# Altium PCB KNoT_Thing_Starter_Board.PcbDoc
Units mm, origin at the board's own origin, x right, y up, seen from the top; angles counter-clockwise.
Board outline 45.72 x 43.18 mm, 2 copper layers (Top Layer, Bottom Layer); 20 components, 31 nets, 133 pads, 19 vias.
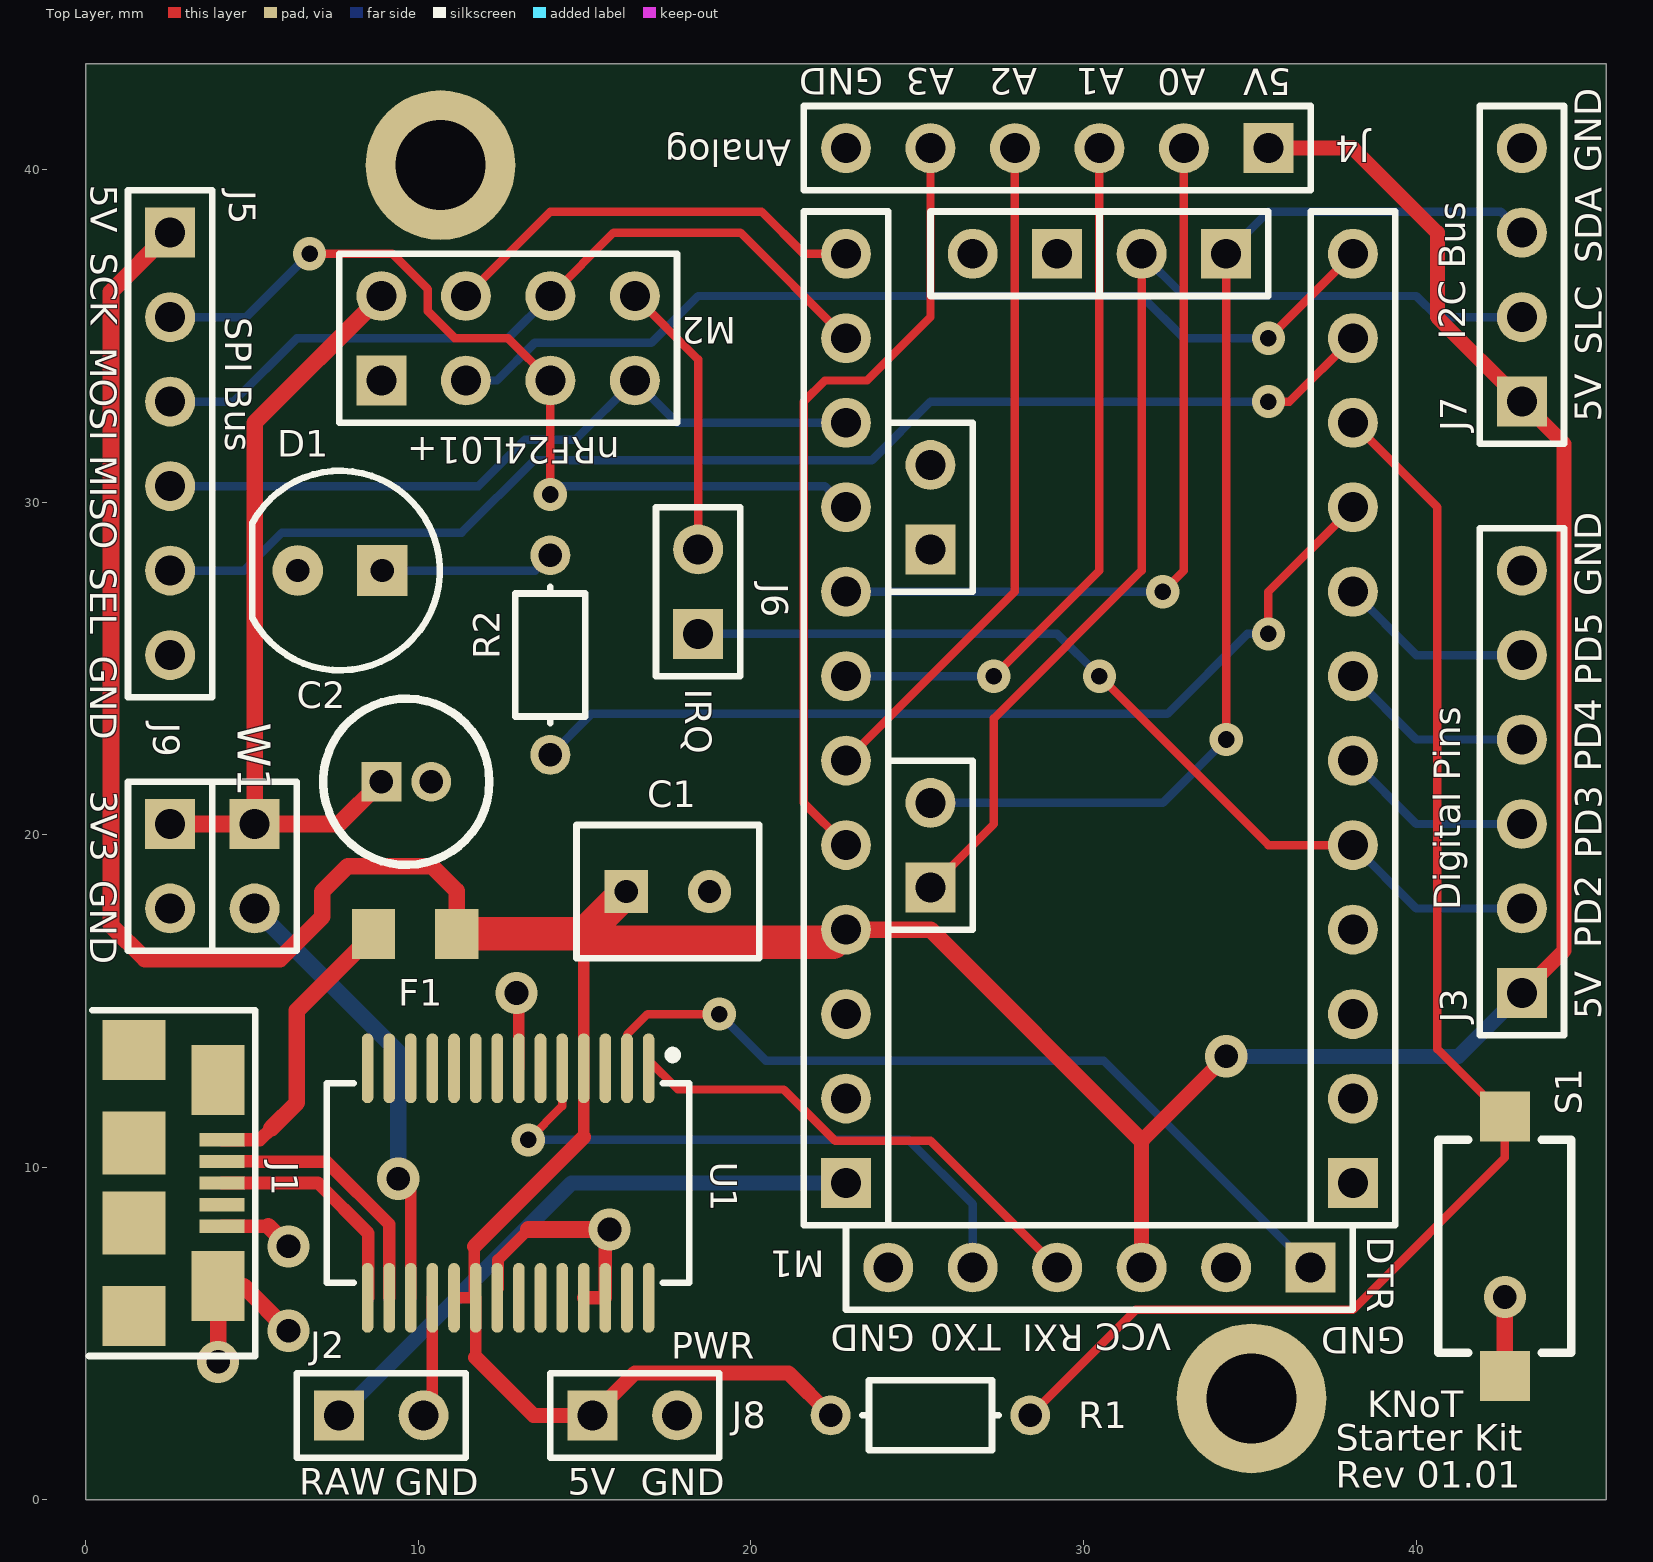
[diagram p0: Top Layer view]
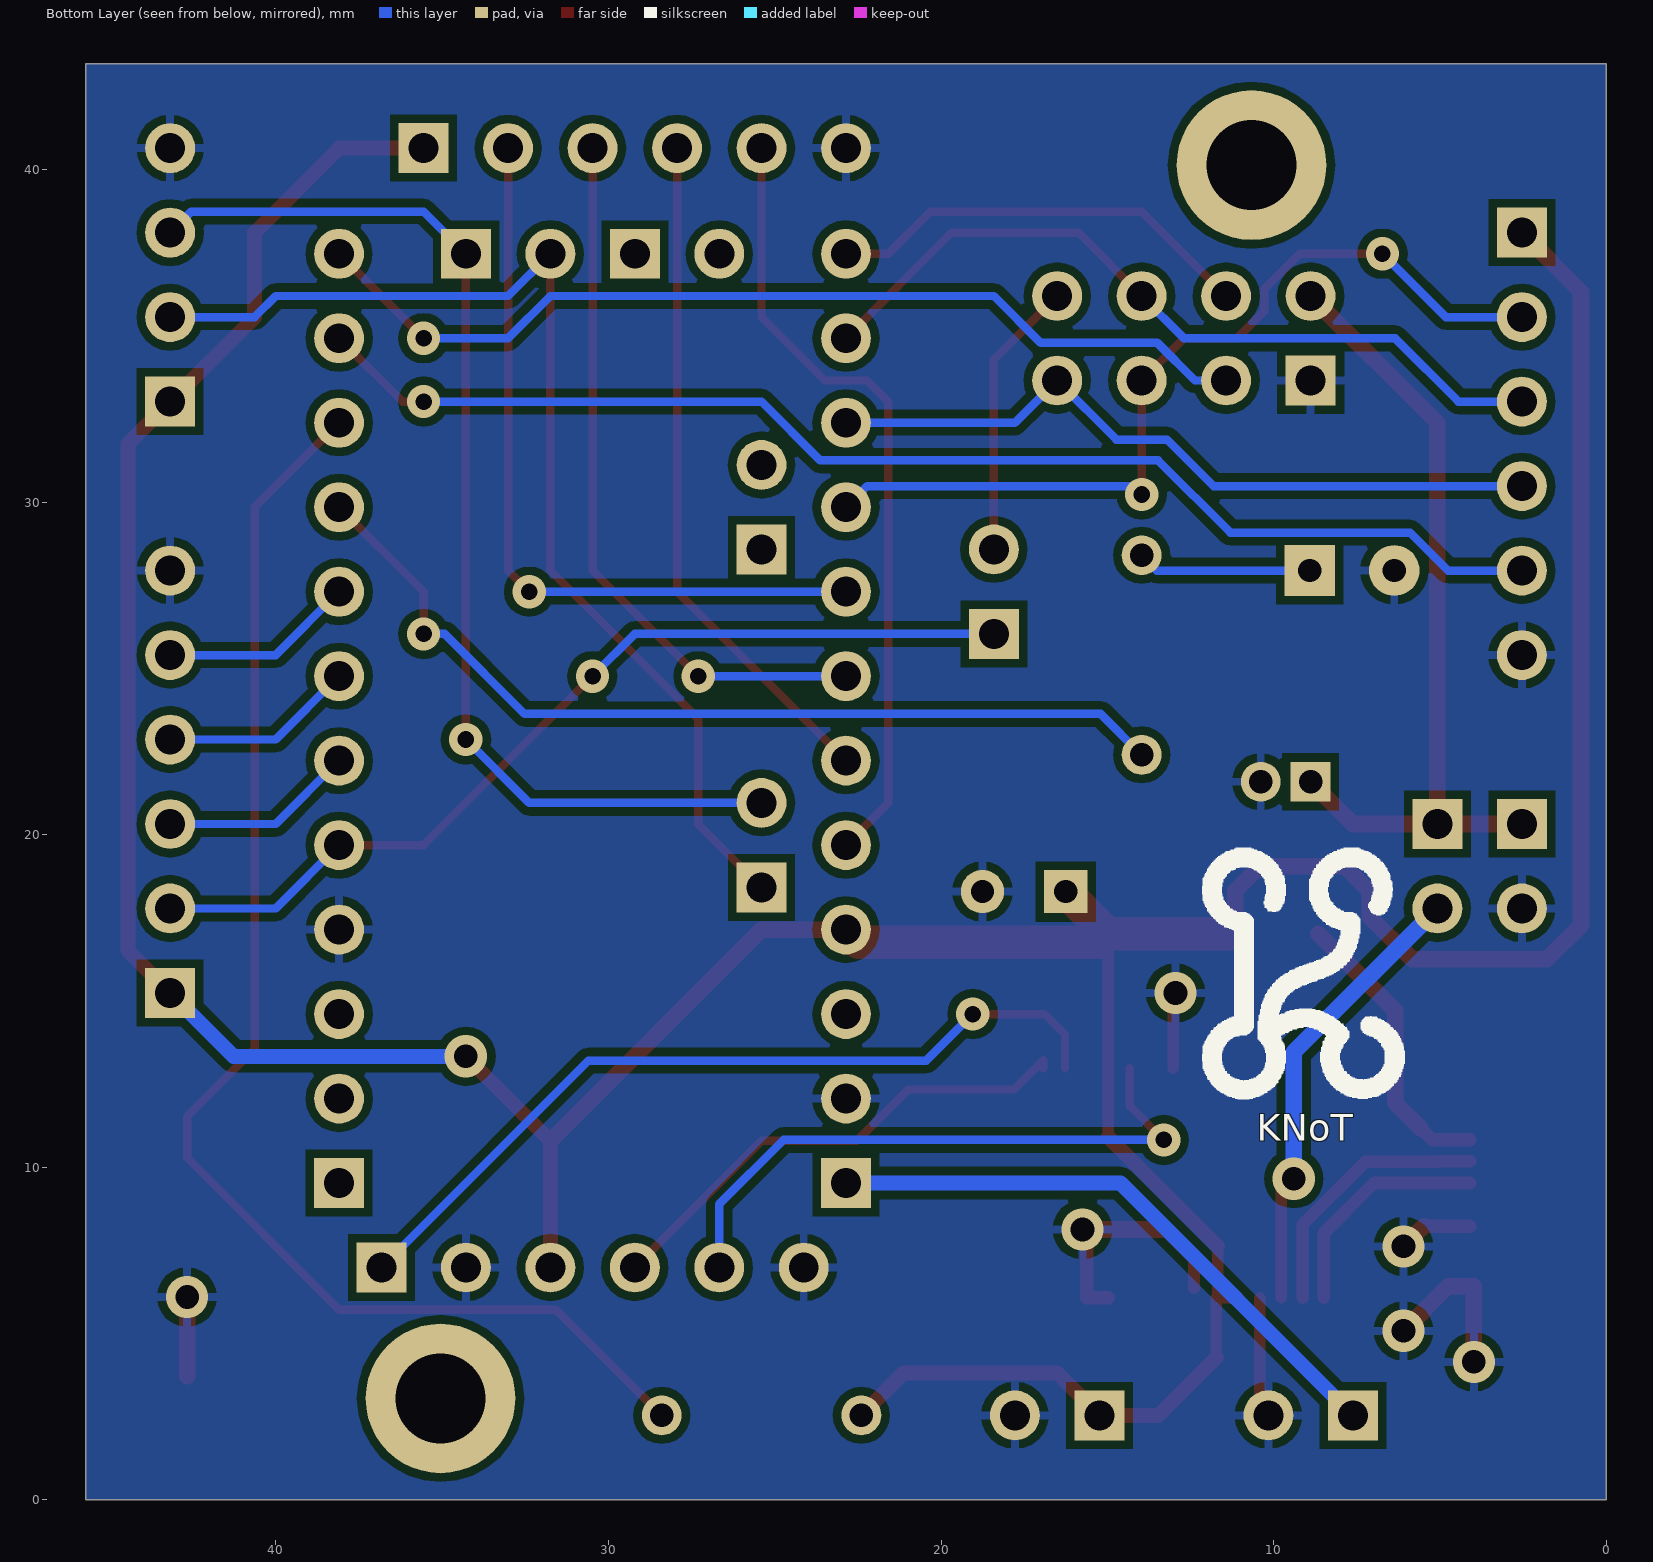
[diagram p1: Bottom Layer view, seen from below]

## Layer stack, top to bottom
Top Solder: solder mask 0.0102, Solder Resist, Dk 3.5
Top Layer: signal copper 0.0356
Dielectric 1: dielectric 0.32, FR-4, Dk 4.8
Bottom Layer: signal copper 0.0356
Bottom Solder: solder mask 0.0102, Solder Resist, Dk 3.5

## Board outline
0,0 45.72,0 45.72,43.18 0,43.18

## Design rules (kind name [scope] priority, off if disabled: settings)
Clearance [All] p1: gap=0.25
DiffPairsRouting [All] p1: maxlimit=0.254 minlimit=0.254 mostfreqgap=0.254 toplayer_minwidth=0.381 toplayer_maxwidth=0.381 toplayer_prefwidth=0.381 bottomlayer_minwidth=0.381 bottomlayer_maxwidth=0.381 bottomlayer_prefwidth=0.381 maxuncoupledlength=12.7
HoleSize [All] p1: absolutevalues=TRUE maxlimit=3 minlimit=0.3 maxpercent=80.000 minpercent=20.000
MinimumSolderMaskSliver [All] p1: minsoldermaskwidth=0.08
PolygonConnect [All] p1: connectstyle=Relief reliefconductorwidth=0.254 reliefentries=4 polygonreliefangle="90 Angle" airgapwidth=0.254
RoutingVias [All] p1: holewidth=0.711 width=1.27 viastyle="Through Hole" minholewidth=0.711 minwidth=1.27 maxholewidth=0.711 maxwidth=1.27
SilkToBoardRegionClearance [All] p1 off:
SilkToSilkClearance [All] p1: silktosilkclearance=0.1
SilkToSolderMaskClearance [IsPad] p1: minsilkscreentomaskgap=0.1 clearancetoexposedcopper=TRUE
SolderMaskExpansion [All] p1: expansion=0.102
Width [All] p1: maxlimit=1 minlimit=0.254 preferedwidth=0.254
23 further rules are at their usual default settings.

## Classes and differential pairs
differential pair USB_FTDI: +USB_FTDI_P -USB_FTDI_N

## Components (designator, comment, footprint, x,y, rotation, side; value= is the part's Value field where it differs from the comment)
C1 "FG11X5R0J107MRT06" "CAP Radial 100uF" 16.256,18.288 r0 top
C2 "ECE-A1EKS4R7" "CAP RADIAL MINIATURE" 8.89,21.59 r0 top
D1 "HLMP-HG64-VY0DD" LED 7.645,27.94 r180 top
F1 "0805L050WR" 0805L 9.906,17.018 r0 top
J1 "ZX62-B-5PA(33)" "Micro USB b" 1.651,9.525 r270 top
J2 "Header 2H" HDR1X2 7.62,2.54 r0 top
J3 "Header 6" HDR1X6 43.18,15.24 r90 top
J4 "Header 6" HDR1X6 35.56,40.64 r180 top
J5 "Header 6" HDR1X6 2.54,38.1 r270 top
J6 "Header 2H" HDR1X2 18.415,26.035 r90 top
J7 "Header 4" HDR1X4 43.18,33.02 r90 top
J8 "Header 2H" HDR1X2 15.24,2.54 r0 top
J9 "Header 2H" HDR1X2 2.54,20.32 r270 top
M1 "Arduino Pro Mini 5V 16MHz" "Arduino Pro Mini" 36.83,6.985 r180 top
M2 "nRF24L01+ Module" "nRF24L01+ Module" 8.89,33.655 r0 top
R1 "CFM14JT10K0" AXIAL-3mm 25.4,2.54 r0 top
R2 "CFM14JT150R" AXIAL-3mm 13.97,25.4 r90 top
S1 "SW-SPST" "SWITCH TS-1181" 42.672,7.62 r90 top
U1 "FT232RL-Reel" SSOP-28_N 12.7,9.525 r270 top
W1 "Jumper" HDR1X2 5.08,20.32 r270 top

## Footprints (in the part's own frame and the unit in brackets; to place one, negate y for a bottom-side part, rotate by r counter-clockwise, add the part's x,y. Pads: shape width x height; smd on the part's side, far side on the other; paste and mask are expansions set on the pad)
0805L [mm] "0805 Hermes"
  rect 1.3x1.5 smd: 1(-1.25,0) 2(1.25,0)
  body extent -1.1,-0.75 1.1,0.75, height 1.24
"Arduino Pro Mini" [mm] "Arduino Pro Mini Module"
  rect 1.5x1.5 hole 0.9: 1(13.97,-2.54) 10(7.62,-30.48) 11(11.43,-21.59) 28(2.54,-30.48) 29(11.43,-11.43) 30(0,0) 34(-1.27,-2.54)
  round 1.5 hole 0.9: 2(5.08,0) 3(13.97,-10.16) 4(-1.27,-7.62) 5(13.97,-7.62) 6(13.97,-20.32) 7(13.97,-17.78) 8(13.97,-15.24) 9(13.97,-12.7) 10(11.43,-24.13) 11(10.16,-30.48) 12(2.54,0) 13(12.7,0) 14(-1.27,-10.16) 15(13.97,-5.08) 16(13.97,-22.86) 17(13.97,-25.4) 18(13.97,-27.94) 19(13.97,-30.48) 20(-1.27,-30.48) 21(-1.27,-27.94) 22(-1.27,-25.4) 23(-1.27,-22.86) 24(-1.27,-20.32) 25(-1.27,-17.78) 26(-1.27,-15.24) 27(-1.27,-12.7) 28(11.43,-13.97) 29(5.08,-30.48) 31(7.62,0) 32(10.16,0) 33(-1.27,-5.08)
  silkscreen extent -2.54,-31.75 15.24,1.27
AXIAL-3mm [mm] "Axial Device, Thru-Hole; 2 Leads; 3.3mm in Pin Spacing"
  round 1.2 hole 0.7: 1(-3,0) 2(3,0)
  silkscreen extent -2.05,-1.05 2.05,1.05, body extent -4.11,-1.2 4.11,1.2, height 2.4
"CAP Radial 100uF" [mm]
  rect 1.3x1.3 hole 0.7: 1(0,0)
  round 1.3 hole 0.7: 2(2.5,0)
  silkscreen extent -1.5,-2 4,2
"CAP RADIAL MINIATURE" [mm]
  rect 1.2x1.2 hole 0.7: 1(0,0)
  round 1.2 hole 0.7: 2(1.5,0)
  silkscreen extent -1.75,-2.5 3.25,2.5
HDR1X2 [mm] "Connector; Header; 2 Position"
  rect 1.5x1.5 hole 0.9: 1(0,0)
  round 1.5 hole 0.9: 2(2.54,0)
  silkscreen extent -1.27,-1.27 3.81,1.27
HDR1X4 [mm] "Connector; Header; 4 Position"
  rect 1.5x1.5 hole 0.9: 1(0,0)
  round 1.5 hole 0.9: 2(2.54,0) 3(5.08,0) 4(7.62,0)
  silkscreen extent -1.27,-1.27 8.89,1.27
HDR1X6 [mm] "Connector; Header; 6 Position"
  rect 1.5x1.5 hole 0.9: 1(0,0)
  round 1.5 hole 0.9: 2(2.54,0) 3(5.08,0) 4(7.62,0) 5(10.16,0) 6(12.7,0)
  silkscreen extent -1.27,-1.27 13.97,1.27
LED [mil]
  rect 60x60 hole 27.56: 1(-50,0)
  round 60 hole 27.56: 2(50,0)
  silkscreen extent -118,-118 104,118, body extent -118,-118 98,118, height 352
"Micro USB b" [mm]
  rect 0.4x1.35 smd: 1(-1.3,2.449) 2(-0.65,2.449) 3(0,2.449) 4(0.65,2.449) 5(1.3,2.449)
  rect 2.1x1.6 smd: 6(3.1,2.33) 11(-3.1,2.33)
  rect 1.8x1.9 smd: 7(4,-0.201) 10(-4,-0.201)
  rect 1.9x1.9 smd: 8(1.2,-0.2) 9(-1.2,-0.201)
  silkscreen extent -5.2,-1.55 5.2,3.45, body extent -4.04,-2.7 4.04,2.9, height 2.78
"nRF24L01+ Module" [mm] "nRF24L01+ Module"
  round 1.5 hole 0.9: 1(0,2.54) 2(7.62,2.54) 4(2.54,0) 5(7.62,0) 6(5.08,2.54) 7(5.08,0) 8(2.54,2.54)
  rect 1.5x1.5 hole 0.9: 3(0,0)
  silkscreen extent -1.27,-1.27 8.89,3.81
SSOP-28_N [mm] "SOP, 28-Leads, Body 10.2x5.3mm, Pitch 0.65mm, IPC Medium Density"
  oval 2.1x0.35 smd: 1(-3.45,4.225) 2(-3.45,3.575) 3(-3.45,2.925) 4(-3.45,2.275) 5(-3.45,1.625) 6(-3.45,0.975) 7(-3.45,0.325) 8(-3.45,-0.325) 9(-3.45,-0.975) 10(-3.45,-1.625) 11(-3.45,-2.275) 12(-3.45,-2.925) 13(-3.45,-3.575) 14(-3.45,-4.225) 15(3.45,-4.225) 16(3.45,-3.575) 17(3.45,-2.925) 18(3.45,-2.275) 19(3.45,-1.625) 20(3.45,-0.975) 21(3.45,-0.325) 22(3.45,0.325) 23(3.45,0.975) 24(3.45,1.625) 25(3.45,2.275) 26(3.45,2.925) 27(3.45,3.575) 28(3.45,4.225)
  silkscreen extent -3.97,-5.45 3,5.45, body extent -3.9,-5.1 3.9,5.1, height 1.9
"SWITCH TS-1181" [mm]
  rect 1.5x1.5 smd: 1(-3.9,0) 2(3.9,0)
  silkscreen extent -3.2,-2 3.2,2, body extent -4,-1.8 4,1.8, height 2.4

## Part data
C1: library part CAPC1608L, "CAP CER 100UF 6.3V X5R RADIAL"
C2: library part CAPC1608L, "CAP ALUM 4.7UF 20% 25V RADIAL"
D1: library part LED, "LED RED DIFF 5MM OVAL T/H"
F1: library part "Fuse 2", "PTC Resettable Fuse 6V 500mA"
J1: library part ZX62R-B-5P, "Micro USB Connector"
J2 J6 J8 J9: "Header, 2-Pin, Right Angle"
J3 J4 J5: "Header, 6-Pin"
J7: "Header, 4-Pin"
R1: library part Res1, "RES 10K OHM 1/4W 5% CF MINI"
R2: library part Res1, "RES 150 OHM 1/4W 5% CF MINI"
S1: "Single-Pole, Single-Throw Switch"
U1: "USB UART Asynchronous Serial Data Transfer Chip, 28-pin SSOP, Tape and Reel"
W1: "Jumper Wire"

## Free pads (board coordinates)
  round 4.5 hole 2.7 unplated: ""(10.668,40.132) ""(35.052,3.048)

## Via types
v1: diameter 1, hole 0.5, Top Layer to Bottom Layer, 11 vias
v2: diameter 1.27, hole 0.711, Top Layer to Bottom Layer, 8 vias

## Nets (pads, with @x,y where several pads share a name; then routed paths per layer and width w, separated by ;. In a path a pad name is that pad's centre, name@x,y a point inside that pad or via, vN(x,y) a via of type N, cw(c..) or ccw(c..) an arc to the next point about the centre after c; other vN are vias at no path point)
AN0: J4.2 M1.6 | length 23.1
  Top Layer w0.254: v1(32.385,27.305) 33.02,27.94 J4.2
  Bottom Layer w0.254: M1.6 v1(32.385,27.305)
AN1: J4.3 M1.7 | length 21.6
  Top Layer w0.254: v1(27.305,24.765) 30.48,27.94 J4.3
  Bottom Layer w0.254: M1.7 v1(27.305,24.765)
AN2: J4.4 M1.8 | length 20.5
  Top Layer w0.254: M1.8 27.94,27.305 J4.4
AN3: J4.5 M1.9 | length 23.8
  Top Layer w0.254: M1.9 21.59,20.955 21.59,33.02 22.225,33.655 23.495,33.655 25.4,35.56 J4.5
CLR_EEPROM: M1.22 R1.2 S1.2 | length 41.5
  Top Layer w0.254: R1.2 31.575,5.715 38.1,5.715 42.672,10.287 S1.2 40.64,13.552 40.64,29.845 M1.22
GND: C1.2 C2.2 D1.2 J1.5 J1.6 J2.2 J3.6 J4.6 J5.6 J7.4 J8.2 J9.2 M1.12 M1.13 M1.14 M1.15 M2.3 S1.1 U1.7 U1.18 U1.21 U1.25 U1.26 | length 23.3
  Top Layer w0.35: J2.2@10.425,2.805 U1.18 ; U1.21@12.396,6.364 12.396,7.211 13.313,8.128 ; U1.7 v2@13.025,15.169
  Top Layer w0.4: J1.5 5.491,8.225 ; J2.2@9.785,2.54 J2.2 J2.2@10.425,2.805 ; v2(12.954,15.24) v2@13.025,15.169 ; U1.25 U1.26 v2@15.625,8.005
  Top Layer w0.5: v2@4.064,4.064 v2(3.981,4.147) J1.6 4.751,6.425 v2(6.096,5.08) ; 5.491,8.225 v2(6.096,7.62) ; 13.313,8.128 v2(15.748,8.128) v2@15.625,8.005 ; S1.1 v2(42.672,6.096)
GPIO_PD2: J3.2 J6.1 M1.27 | length 28.2
  Top Layer w0.254: v1(30.48,24.765) 35.56,19.685 M1.27
  Bottom Layer w0.254: J6.1 29.21,26.035 v1(30.48,24.765) ; M1.27 40.005,17.78 J3.2
GPIO_PD3: J3.3 M1.26 | length 5.9
  Bottom Layer w0.254: M1.26 40.005,20.32 J3.3
GPIO_PD4: J3.4 M1.25 | length 5.9
  Bottom Layer w0.254: M1.25 40.005,22.86 J3.4
GPIO_PD5: J3.5 M1.24 | length 5.9
  Bottom Layer w0.254: M1.24 40.005,25.4 J3.5
I2C_SCL: J7.2 M1.29 | length 33.9
  Top Layer w0.254: M1.29@25.4,18.415 27.305,20.32 27.305,23.495 31.75,27.94 M1.29@31.75,37.465
  Bottom Layer w0.254: M1.29@31.75,37.465 33.02,36.195 40.005,36.195 40.64,35.56 J7.2
I2C_SDA: J7.3 M1.28 | length 34
  Top Layer w0.254: v1(34.29,22.86) 34.29,26.646 34.29,36.195 M1.28@34.29,37.465
  Bottom Layer w0.254: M1.28@25.4,20.955 32.385,20.955 v1(34.29,22.86) ; M1.28@34.29,37.465 35.56,38.735 42.545,38.735 J7.3
MCU_DTR: M1.30 U1.2 | length 25
  Top Layer w0.254: U1.2 16.275,13.986 16.894,14.605 v1(19.05,14.605)
  Bottom Layer w0.254: v1(19.05,14.605) 20.447,13.208 30.607,13.208 M1.30
MCU_RXD: M1.31 U1.1 | length 15.1
  Top Layer w0.254: U1.1 16.925,13.218 17.806,12.337 20.989,12.337 22.531,10.795 25.4,10.795 M1.31
MCU_TXD: M1.32 U1.5 | length 18.6
  Top Layer w0.254: v1(13.309,10.821) 14.325,11.836 U1.5
  Bottom Layer w0.254: v1(13.309,10.821) 24.739,10.821 26.67,8.89 M1.32
NetD1_1: D1.1 R2.2 | length 5.2
  Bottom Layer w0.254: D1.1 13.51,27.94 R2.2
NetJ6_2: J6.2 M2.2 | length 8.4
  Top Layer w0.254: M2.2 18.415,34.29 J6.2
RAW: J2.1 M1.1 | length 18.1
  Bottom Layer w0.45: J2.1 14.605,9.525 M1.1
RF_CE: M1.20 M2.4 | length 29.3
  Top Layer w0.254: v1(35.56,34.925) M1.20
  Bottom Layer w0.254: M2.4 12.366,33.655 13.5,34.789 17.009,34.789 18.415,36.195 31.75,36.195 33.02,34.925 v1(35.56,34.925)
SPI_EXT_SELECT: J5.5 M1.21 | length 38.5
  Top Layer w0.254: v1(35.56,33.02) 36.195,33.02 M1.21
  Bottom Layer w0.254: J5.5 4.759,27.94 5.902,29.083 11.303,29.083 13.474,31.254 23.634,31.254 25.4,33.02 v1(35.56,33.02)
SPI_MISO: J5.4 M1.17 M2.5 | length 22.2
  Bottom Layer w0.254: J5.4 11.811,30.48 13.208,31.877 14.732,31.877 M2.5 17.78,32.385 M1.17
SPI_MOSI: J5.3 M1.18 M2.6 | length 23.7
  Top Layer w0.254: M2.6 15.875,38.1 19.685,38.1 M1.18
  Bottom Layer w0.254: J5.3 4.445,33.02 6.35,34.925 12.7,34.925 M2.6
SPI_SCK: J5.2 M1.16 M2.7 | length 27
  Top Layer w0.254: v1(6.731,37.465) 9.22,37.465 10.287,36.398 10.287,35.739 11.101,34.925 12.7,34.925 M2.7 13.97,30.48 v1(13.97,30.226)
  Bottom Layer w0.254: J5.2 4.826,35.56 v1(6.731,37.465) ; v1(13.97,30.226) 13.97,30.48 22.225,30.48 M1.16
SPI_SELECT: M1.19 M2.8 | length 13
  Top Layer w0.254: M2.8 13.97,38.735 20.32,38.735 21.59,37.465 M1.19
STATUS_LED: M1.23 R2.1 | length 28
  Top Layer w0.254: v1(35.56,26.035) 35.56,27.305 M1.23
  Bottom Layer w0.254: R2.1 15.201,23.631 32.521,23.631 34.925,26.035 v1(35.56,26.035)
USB_FTDI_N: J1.2 U1.16 | length 8
  Top Layer w0.381: J1.2 5.08,10.175 5.095,10.16 7.248,10.16 9.131,8.278 U1.16@9.131,6.075
USB_FTDI_P: J1.3 U1.15 | length 7
  Top Layer w0.381: J1.3 5.08,9.525 6.985,9.525 8.496,8.015 U1.15@8.496,6.075
VBUS: F1.1 J1.1 | length 8.7
  Top Layer w0.4: J1.1 5.237,10.825 5.588,11.176
  Top Layer w0.5: 5.588,11.176 6.35,11.938 6.35,14.712 F1.1
VCC_3V3: C2.1 J9.1 M2.1 W1.1 | length 24.3
  Top Layer w0.5: J9.1 W1.1 ; C2.1 7.62,20.32 W1.1 ; M2.1 5.08,32.385 W1.1
VCC_3V3_FTDI: U1.17 W1.2 | length 13.6
  Top Layer w0.35: v2(9.398,9.652) 9.775,9.275 U1.17
  Bottom Layer w0.5: W1.2 9.398,13.462 v2(9.398,9.652)
VCC_5V: C1.1 F1.2 J3.1 J4.1 J5.1 J7.1 J8.1 M1.2 M1.3 R1.1 U1.4 U1.19 U1.20 | length 136.2
  Top Layer w0.35: U1.19 U1.20@11.721,6.075 ; U1.20@11.684,6.112 11.684,7.62 ; 11.725,4.277 U1.20 ; 14.975,10.911 U1.4 14.975,17.007 15.218,16.764
  Top Layer w0.45: 11.684,7.62 14.975,10.911 ; 11.725,4.277 13.462,2.54 J8.1 16.51,3.81 21.13,3.81 R1.1 ; M1.2 31.75,10.795 v2(34.29,13.335) ; J4.1 38.1,40.64 40.64,38.1 40.64,35.56 J7.1 44.45,31.75 44.45,16.51 J3.1
  Top Layer w0.5: J5.1 0.762,36.322 0.762,17.272 1.778,16.256 5.842,16.256 7.112,17.526 7.112,18.288 7.874,19.05 10.414,19.05 11.156,18.308 F1.2 ; M1.3@22.479,16.764 M1.3 25.4,17.145 31.75,10.795
  Top Layer w1: F1.2 14.986,17.018 C1.1 ; 15.218,16.764 M1.3@22.479,16.764
  Bottom Layer w0.45: v2(34.29,13.335) 41.275,13.335 J3.1
pads on no net: J1.4 J1.7 J1.8 J1.9 J1.10 J1.11 M1.4 M1.5 M1.10 M1.11 M1.33 M1.34 U1.3 U1.6 U1.8 U1.9 U1.10 U1.11 U1.12 U1.13 U1.14 U1.22 U1.23 U1.24 U1.27 U1.28

## Polygon pours and split planes (outlines as drawn)
GND on Bottom Layer "GND plane" (solid, pour order 8): 0,0 0,43.18 45.72,43.18 45.72,0

## Silkscreen, mask and mechanical layers (free items; w line width, h text height)
Top Overlay:
  text "GND" at 23.984,43.046 h0.8 r180
  text "A2" at 28.607,43.046 h0.8 r180
  text "A3" at 26.114,43.037 h0.8 r180
  text "A1" at 31.22,43.037 h0.8 r180
  text "A0" at 33.68,43.028 h0.8 r180
  text "5V" at 36.246,43.028 h0.8 r180
  text "Analog" at 21.209,40.894 h0.8 r180
  text "GND" at 45.564,39.919 h0.8 r90
  text "5V" at 0.152,39.548 h0.8 r270
  text "SCK" at 0.152,37.49 h0.8 r270
  text "SDA" at 45.58,37.179 h0.8 r90
  text "SPI Bus" at 4.191,35.56 h0.8 r270
  text "I2C Bus" at 41.478,34.874 h0.8 r90
  text "MOSI" at 0.143,34.649 h0.8 r270
  text "SLC" at 45.58,34.436 h0.8 r90
  text "5V" at 45.571,32.407 h0.8 r90
  text "nRF24L01+" at 16.053,31.953 h0.8 r180
  text "MISO" at 0.134,31.401 h0.8 r270
  text "SEL" at 0.143,28.019 h0.8 r270
  text "GND" at 45.564,27.168 h0.8 r90
  text "GND" at 0.134,25.381 h0.8 r270
  text "PD5" at 45.58,24.479 h0.8 r90
  text "IRQ" at 18.034,24.384 h0.8 r270
  text "PD4" at 45.564,21.885 h0.8 r90
  text "3V3" at 0.149,21.314 h0.8 r270
  text "PD3" at 45.58,19.272 h0.8 r90
  text "GND" at 0.14,18.625 h0.8 r270
  text "Digital Pins" at 41.326,17.729 h0.8 r90
  text "PD2" at 45.571,16.583 h0.8 r90
  text "5V" at 45.571,14.449 h0.8 r90
  text "DTR" at 38.529,7.903 h0.8 r270
  text "TX0" at 27.518,5.279 h0.8 r180
  text "VCC" at 32.642,5.286 h0.8 r180
  text "GND" at 24.924,5.27 h0.8 r180
  text "RXI" at 30.004,5.27 h0.8 r180
  text "GND" at 39.675,5.182 h0.8 r180
  text "PWR" at 17.602,4.242 h0.8
  text "KNoT" at 38.532,2.489 h0.8
  text "Starter Kit" at 37.592,1.473 h0.8
  text "Rev 01.01" at 37.592,0.356 h0.8
  text "RAW" at 6.423,0.149 h0.8
  text "GND" at 9.29,0.14 h0.8
  text "5V" at 14.5,0.149 h0.8
  text "GND" at 16.681,0.14 h0.8
Bottom Overlay:
  drawing of 853 lines, arcs and shapes, not listed
  text "KNoT" at 10.503,10.795 h0.8
Mechanical 1:
  the board outline again, w0.05